# Altium PCB Connector_PCB.PcbDoc
Units mm, origin at the board's own origin, x right, y up, seen from the top; angles counter-clockwise.
Board outline 26.81 x 25.27 mm, 2 copper layers (Top Layer, Bottom Layer), stack 2.072 mm thick; 9 components, 7 nets, 30 pads, 1 vias.
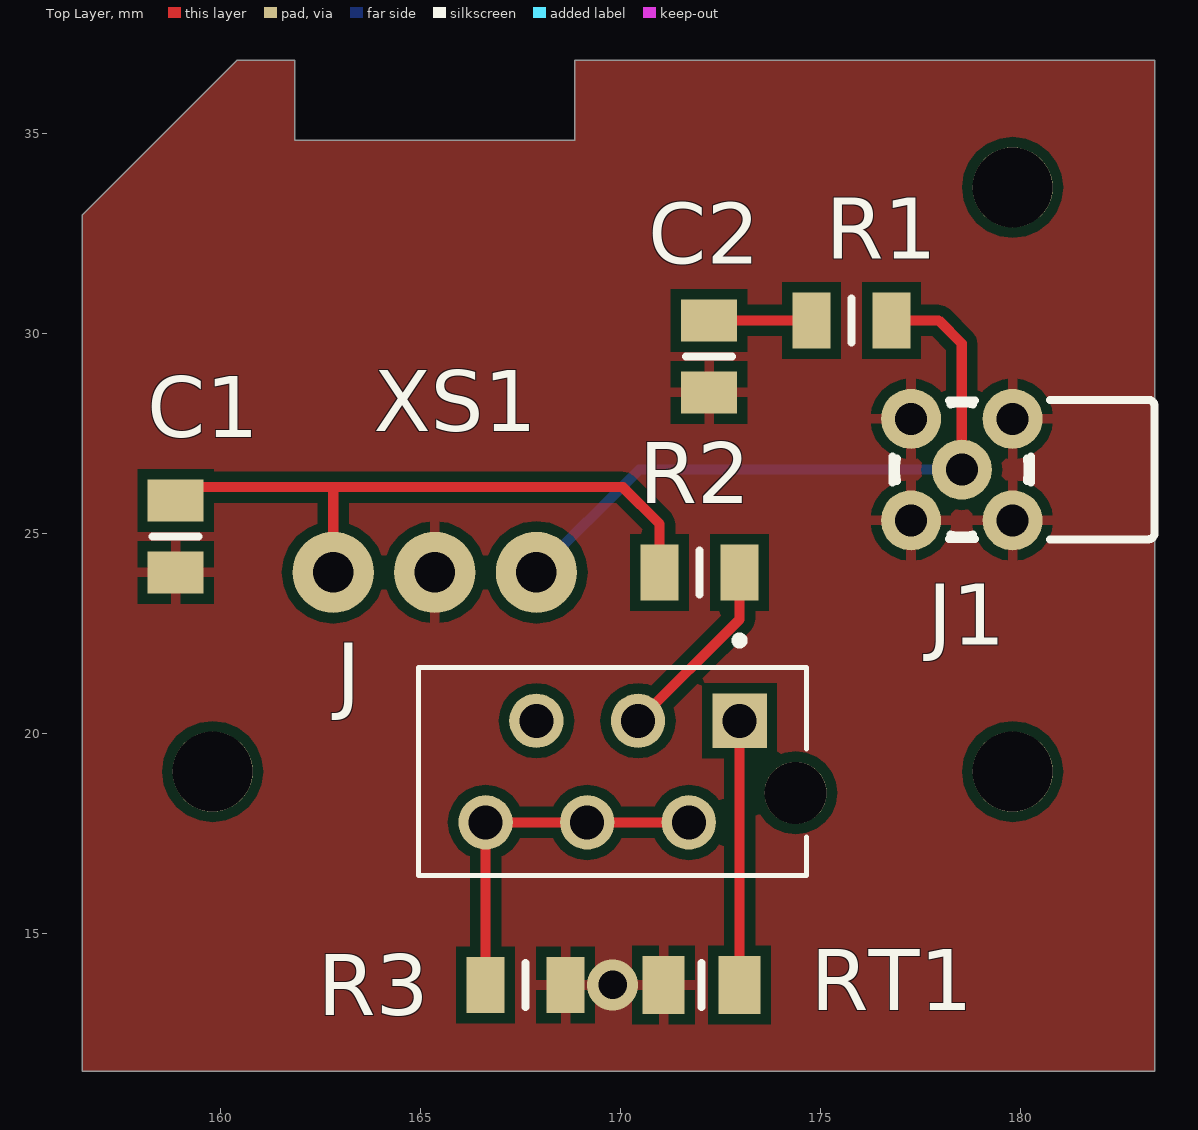
[diagram p0: Top Layer view]
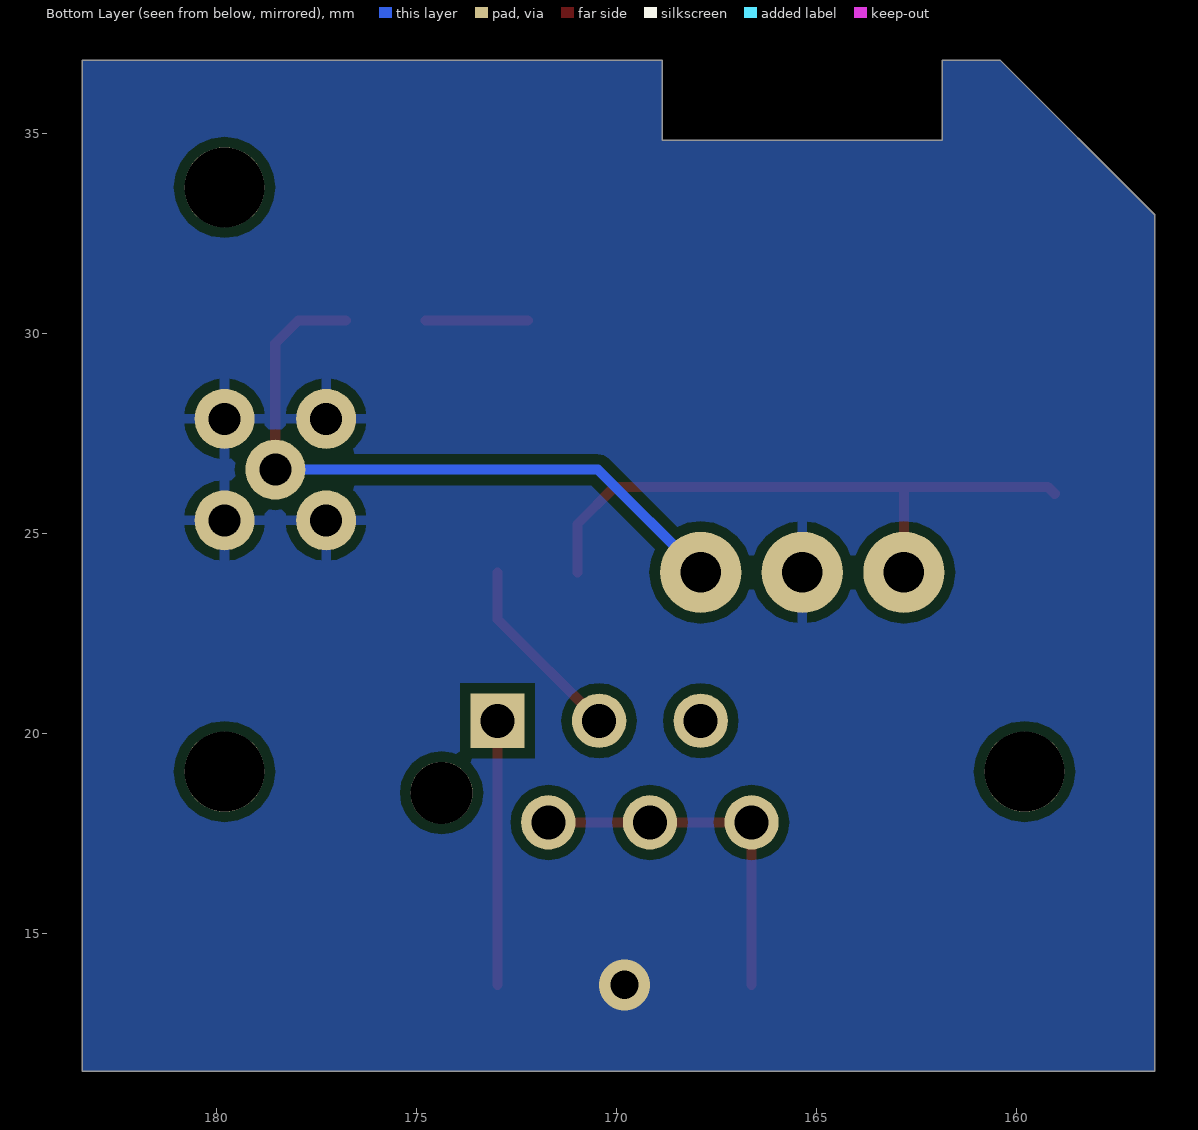
[diagram p1: Bottom Layer view, seen from below]
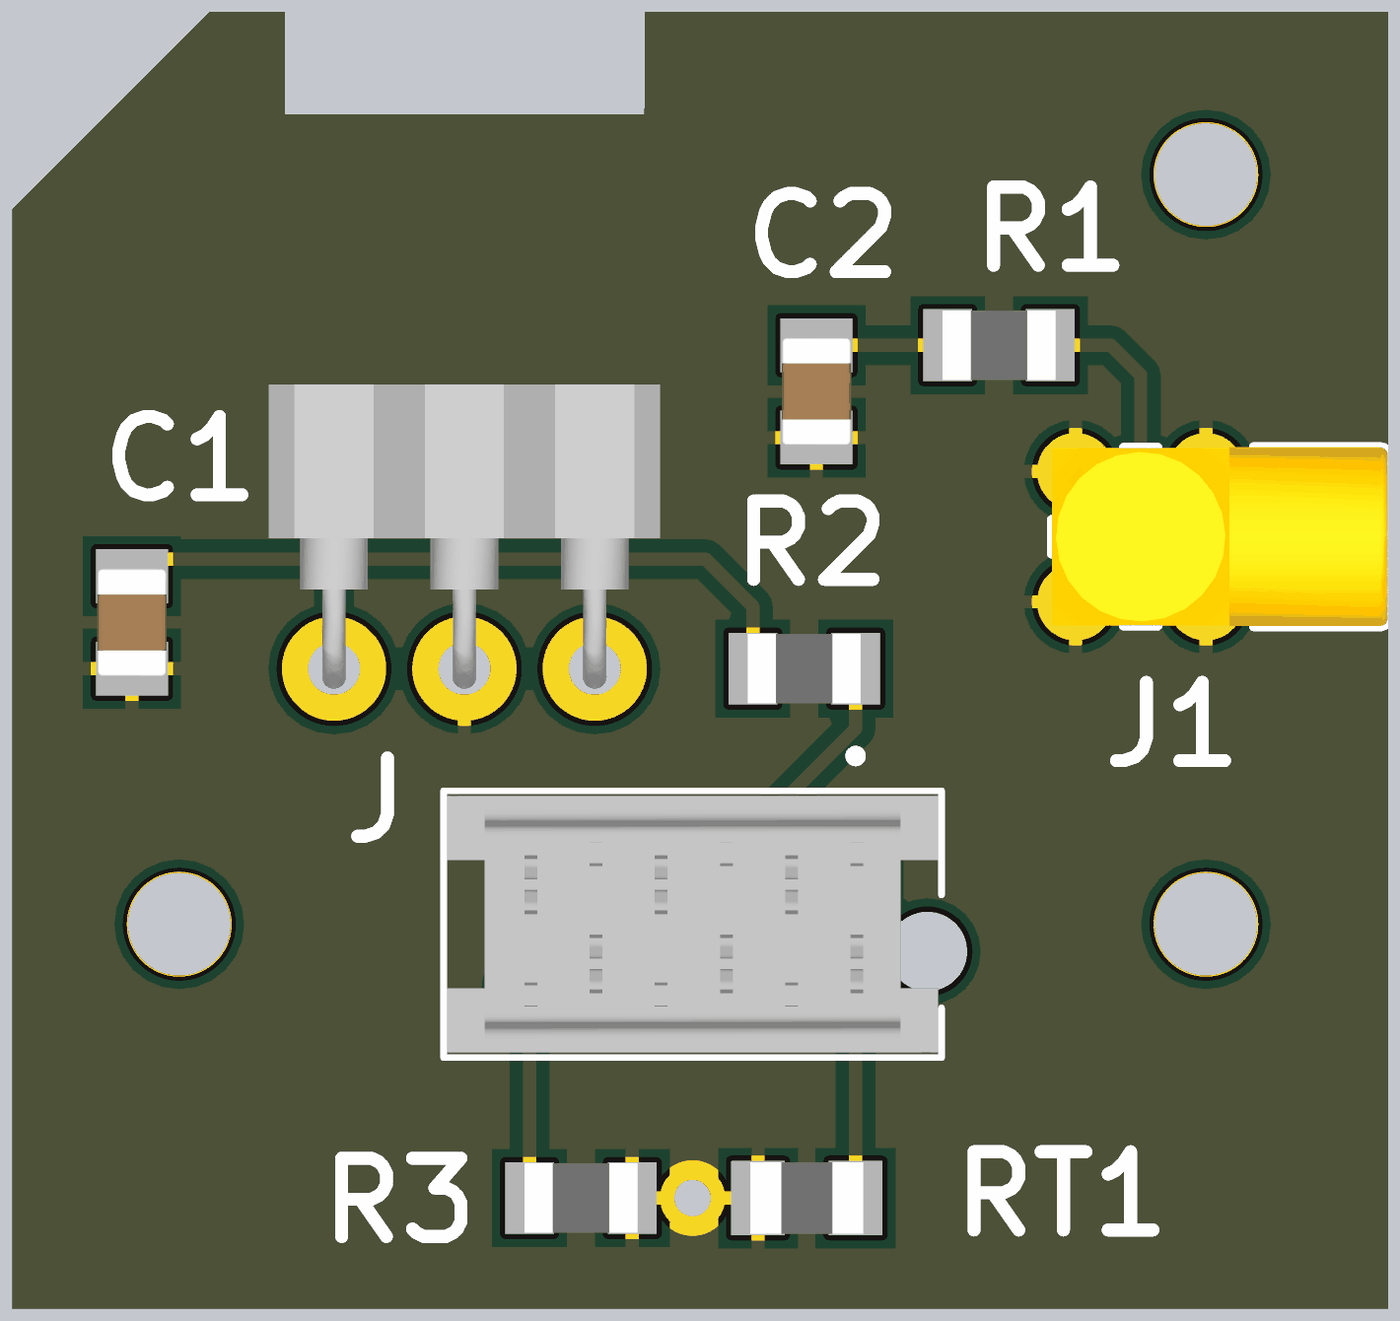
[diagram p2: 3D render of the assembled board from above, using the file's embedded part models]

## Layer stack, top to bottom
Top Solder: solder mask 0.01, Solder Resist, Dk 3.5
Top Layer: signal copper 0.036
Dielectric 1: dielectric 2, FR-4, Dk 4.8
Bottom Layer: signal copper 0.036
Bottom Solder: solder mask 0.01, Solder Resist, Dk 3.5

## Board outline
156.544,11.557 156.544,32.973 160.401,36.83 161.854,36.83 161.854,34.83 168.854,34.83 168.854,36.83 183.352,36.83 183.352,11.557

## Design rules (kind name [scope] priority, off if disabled: settings)
Clearance [All] p1: gap=0.254 ignorepadtopadclearanceinfootprint=FALSE except(0: Arc-Hole Track-Hole SMDPad-Hole THPad-Hole Via-Hole Fill-Hole Poly-Hole Region-Hole Text-Hole)
PolygonConnect [All] p1: thpad.connectstyle=Relief thpad.reliefconductorwidth=0.254 thpad.reliefentries=4 thpad.polygonreliefangle="90 Angle" thpad.airgapwidth=0.254 smdpad.connectstyle=Relief smdpad.reliefconductorwidth=0.254 smdpad.reliefentries=4 smdpad.polygonreliefangle="90 Angle" smdpad.airgapwidth=0.254 via.connectstyle=Direct via.reliefconductorwidth=0.254 via.reliefentries=4 via.polygonreliefangle="90 Angle" via.airgapwidth=0.254
RoutingVias [All] p1: holewidth=0.711 width=1.27 viastyle="Through Hole" minholewidth=0.711 minwidth=1.27 maxholewidth=0.711 maxwidth=1.27
SolderMaskExpansion [All] p1: expansion=0.102
Width [All] p1: maxlimit=0.254 minlimit=0.254 preferedwidth=0.254
30 further rules are at their usual default settings.

## Components (designator, comment, footprint, x,y, rotation, side; value= is the part's Value field where it differs from the comment)
C1 "100nF" CAPC2012X135N 158.877,24.93 r90 top
C2 "100nF" CAPC2012X135N 172.212,29.431 r90 top
J "7-215079-6" TE_7-215079-6 172.974,20.32 r0 top
J1 "Coax_1Female_1Shield" HUBER-SUHNER_85_MMCX-50-0-1/111_OE 178.529,26.6 r0 top
R1 "49R9" RESC2012X60N 175.768,30.331 r0 top
R2 "1k" RESC2012X60N 171.974,24.03 r0 top
R3 "0" RESC2012X60N 167.624,13.716 r0 top
RT1 "100k" THERMC2013X95N 172.024,13.716 r0 top
XS1 "3pin_header_ra_SCSL" 3pin_header_SCSL_FEMALE 167.894,24.03 r180 top

## Footprints (in the part's own frame and the unit in brackets; to place one, negate y for a bottom-side part, rotate by r counter-clockwise, add the part's x,y. Pads: shape width x height; smd on the part's side, far side on the other; paste and mask are expansions set on the pad)
3pin_header_SCSL_FEMALE [mil]
  round 80 hole 40: 0(0,0) 1(100,0) 2(200,0)
  body extent -50,-218 250,15, height 100
CAPC2012X135N [mm] "Chip Capacitor, Body 2.0x1.25mm, IPC Medium Density"
  rect 1.05x1.4 smd: 1(-0.9,0) 2(0.9,0)
  silkscreen extent 0,-0.58 0,0.58, body extent -1.05,-0.67 1.05,0.68, height 1.25
HUBER-SUHNER_85_MMCX-50-0-1/111_OE [mm] "MMCX 50 Ohm Right Angle PCB Jack"
  round 1.5 hole 0.8: 1(0,0) 2(-1.27,-1.27) 2(-1.27,1.27) 2(1.27,-1.27) 2(1.27,1.27)
  silkscreen extent -1.73,-1.74 4.82,1.74, body extent -1.73,-1.74 4.82,1.74, height 3.8
RESC2012X60N [mm] "Chip Resistor, EIA 0805, Metric 2012, Body 2.0x1.2mm, IPC Medium Density"
  rect 0.95x1.4 smd: 1(-1,0) 2(1,0)
  silkscreen extent 0,-0.55 0,0.55, body extent -1.1,-0.67 1.1,0.68, height 0.6
TE_7-215079-6 [mm]
  rect 1.358x1.358 hole 0.85: 1(0,0)
  round 1.358 hole 0.85: 2(-1.27,-2.54) 3(-2.54,0) 4(-3.81,-2.54) 5(-5.08,0) 6(-6.35,-2.54)
  round 1.55 hole 1.55 unplated: ""(1.4,-1.8)
  silkscreen extent -8.03,-3.87 1.68,2.11, body extent -7.95,-3.77 1.61,1.23, height 4.1
THERMC2013X95N [mm] "PTC Thermistors, Chip; 2.0mm L X 1.25mm W X 0.95mm H, IPC Medium Density"
  rect 1.05x1.45 smd: 1(-0.95,0) 2(0.95,0)
  silkscreen extent 0,-0.55 0,0.55, body extent -1.1,-0.7 1.1,0.7, height 0.95

## Part data
C1 C2: library part CC0805_100NF_50V_10%_X7R, "Non-polarised capacitor", Case=0805, Manufacturer=GENERIC, Manufacturer1 ComponentHeight=1mm, Manufacturer1 Example=TDK, Manufacturer1 Part Number=C2012X7R1H104K085AA, Tolerance=±10%, Voltage=50V, Author="CERN DEM JLC", Component Type=Standard, CreateDate=03.12.2007, HelpURL=\\cern.ch\dfs\Applications\Altium\Datasheets\CC0805_X7R_TDK_C.pdf, LatestRevisionDate=22.04.2015, Manufacturer Part Number=CC0805_100NF_50V_10%_X7R, Mounted=Yes, Part Description="SMD Multilayer Chip Ceramic Capacitor", Part Number=CC0805_100NF_50V_10%_X7R, Pin Count=2, Sense=No, SMD=Yes, Socket=No, Status=Preferred, TC=X7R
J: "Conn FFC Connector F 6 POS 1.27mm Solder ST Thru-Hole Automotive Box/Carton", Package=None, Availability=Unavailable, MF="TE Connectivity", MP=7-215079-6, Price=None, SnapEDA_Link=https://www.snapeda.com/parts/7-215079-6/TE%20Connectivity%20AMP%20Connectors/view-part/498770/?ref=snap
J1: library part HUBER-SUHNER_85_MMCX-50-0-1/111_OE, Manufacturer=HUBER+SUHNER, Manufacturer Part Number=85_MMCX-50-0-1/111_OE, Author="CERN DEM JLC", ComponentHeight=9.6mm, Component Type=Standard, CreateDate=06.11.2014, Family=MMCX, HelpURL=\\cern.ch\dfs\Applications\Altium\Datasheets\HUBER-SUHNER_85_MMCX-50-0-1-111_OE.pdf, LatestRevisionDate=06.11.2014, Mounted=Yes, Part Description="MMCX 50 Ohms Right Angle PCB Jack", Part Number=HUBER-SUHNER_85_MMCX-50-0-1/111_OE, Pin Count=2, PressFit=No, Sense=No, SMD=No, Socket=No, Status=None
R1: library part R0805_49R9_0.1%_0.1W_10PPM, "Resistor - 0.1%", Case=0805, Manufacturer=GENERIC, Manufacturer1 ComponentHeight=0.6mm, Manufacturer1 Example="TYCO HOLSWORTHY", Manufacturer1 Part Number=RN73C2A49R9BTG, Power=0.1W, Tolerance=±0.1%, Author="CERN DEM JLC", Component Type=Standard, CreateDate=03.12.2007, HelpURL=\\cern.ch\dfs\Applications\Altium\Datasheets\R0805_Tyco_RN73.pdf, LatestRevisionDate=13.03.2008, Manufacturer Part Number=R0805_49R9_0.1%_0.1W_10PPM, Mounted=Yes, Part Description="Thin Film Chip Resistor", Part Number=R0805_49R9_0.1%_0.1W_10PPM, Pin Count=2, PressFit=No, Sense=No, SMD=Yes, Socket=No, Status="Not Recommended", TC=±10ppm
R2: library part R0805_1K_1%_0.33W_100PPM_VISHAY_CRCW-HP, "Resistor - 1%", Case=0805, Manufacturer="VISHAY DRALORIC", Manufacturer1 ComponentHeight=0.6mm, Manufacturer Part Number=CRCW08051K00FKEAHP, Power=0.33W, Tolerance=±1%, Author="CERN DEM JLC", Component Type=Standard, CreateDate=16.06.2010, HelpURL="\\cern.ch\dfs\Applications\Altium\Datasheets\R0805_VISHAY_CRCW-HP e3.pdf", LatestRevisionDate=16.06.2010, Mounted=Yes, Part Description="150V, Pulse Proof, High Power Thick Film Chip Resistor", Part Number=R0805_1K_1%_0.33W_100PPM_VISHAY_CRCW-HP, Pin Count=2, PressFit=No, Sense=No, SMD=Yes, Socket=No, Status=None, TC=±100ppm/°C
R3: library part R0805_0R_JUMPER, "Resistor", Case=0805, Manufacturer=GENERIC, Manufacturer1 ComponentHeight=0.6mm, Manufacturer1 Example="NIC COMPONENT", Manufacturer1 Part Number=NRC10Z0, Author="CERN DEM JLC", Component Type=Standard, CreateDate=03.12.2007, HelpURL=\\cern.ch\dfs\Applications\Altium\Datasheets\R0805_NIC_NRC.pdf, LatestRevisionDate=13.03.2008, Manufacturer Part Number=R0805_0R_JUMPER, Mounted=Yes, Part Description="2A (0.05R Max DC Resistance) Zero Ohm Jumper", Part Number=R0805_0R_JUMPER, Pin Count=2, PressFit=No, Sense=No, SMD=Yes, Socket=No, Status=Preferred
RT1: library part THERM_NTC_68K_VISHAY_NTCS0805E3683FXT, "Thermistor NTC (Negative Temperature Coefficient)", Case=0805, Manufacturer=VISHAY, Manufacturer Part Number=NTCS0805E3683FXT, Power=210mW, Tolerance=±1%, Author="CERN DEM JLC", Component Type=Standard, ComponentHeight=0.95mm, CreateDate=28.10.2013, HelpURL=\\cern.ch\dfs\Applications\Altium\Datasheets\THERM_VISHAY_NTCS0805E3683FXT.pdf, LatestRevisionDate=28.10.2013, Mounted=Yes, Part Description="SMD 0805, Glass Protected NTC Thermistors", Part Number=THERM_NTC_68K_VISHAY_NTCS0805E3683FXT, Pin Count=2, Sense=No, SMD=Yes, Socket=No, Status=None

## Free pads (board coordinates)
  round 2 hole 2: 5(159.799,19.05) 5(179.799,19.05) 5(179.799,33.655)

## Via types
v1: diameter 1.27, hole 0.711, Top Layer to Bottom Layer, 1 vias

## Nets (pads, with @x,y where several pads share a name; then routed paths per layer and width w, separated by ;. In a path a pad name is that pad's centre, name@x,y a point inside that pad or via, vN(x,y) a via of type N, cw(c..) or ccw(c..) an arc to the next point about the centre after c; other vN are vias at no path point)
GND: C1.1 C2.1 J1.2 R3.2 RT1.1 XS1.1
  other v1: 169.799,13.716
NetC1_2: C1.2 R2.1 XS1.2 | length 15.7
  Top Layer w0.254: C1.2@159.043,25.996 159.209,26.162 162.814,26.162 ; XS1.2 162.814,26.162 ; R2.1 170.974,25.241 170.053,26.162 162.814,26.162
NetC2_2: C2.2 R1.1 | length 2.6
  Top Layer w0.254: C2.2 R1.1
NetJ1_1: J1.1 R1.2 XS1.0 | length 16.9
  Top Layer w0.254: R1.2 177.949,30.331 178.529,29.751 J1.1
  Bottom Layer w0.254: XS1.0 170.464,26.6 J1.1
NetJ_1: J.1 RT1.2 | length 6.6
  Top Layer w0.254: RT1.2 J.1
NetJ_2: J.2 J.4 J.6 R3.1 | length 9.1
  Top Layer w0.254: R3.1 J.6 J.4 J.2
NetJ_3: J.3 R2.2 | length 4.8
  Top Layer w0.254: J.3 172.974,22.86 R2.2
pads on no net: J. J.5

## Polygon pours and split planes (outlines as drawn)
GND on Top Layer "GND_L01_P000" (solid, remove dead copper, pour order 0): 156.544,32.973 160.401,36.83 161.854,36.83 161.854,34.83 168.854,34.83 168.854,36.83 183.352,36.83 183.352,11.557 156.544,11.557
GND on Bottom Layer "GND_L02_P001" (solid, remove dead copper, pour order 1): 156.544,32.973 160.401,36.83 161.854,36.83 161.854,34.83 168.854,34.83 168.854,36.83 183.352,36.83 183.352,11.557 156.544,11.557

## Silkscreen, mask and mechanical layers (free items; w line width, h text height)
Mechanical 1:
  lines w0.1: 183.352,36.83 183.352,11.557 156.544,11.557 156.544,32.973 160.401,36.83 161.854,36.83 161.854,34.83 168.854,34.83 168.854,36.83 183.352,36.83 ; 183.352,36.83 183.352,36.83